# EAGLE board 13732-sparkfun-photon-redboard-panel_v10new (EAGLE 7.5.0), part 1 of 3
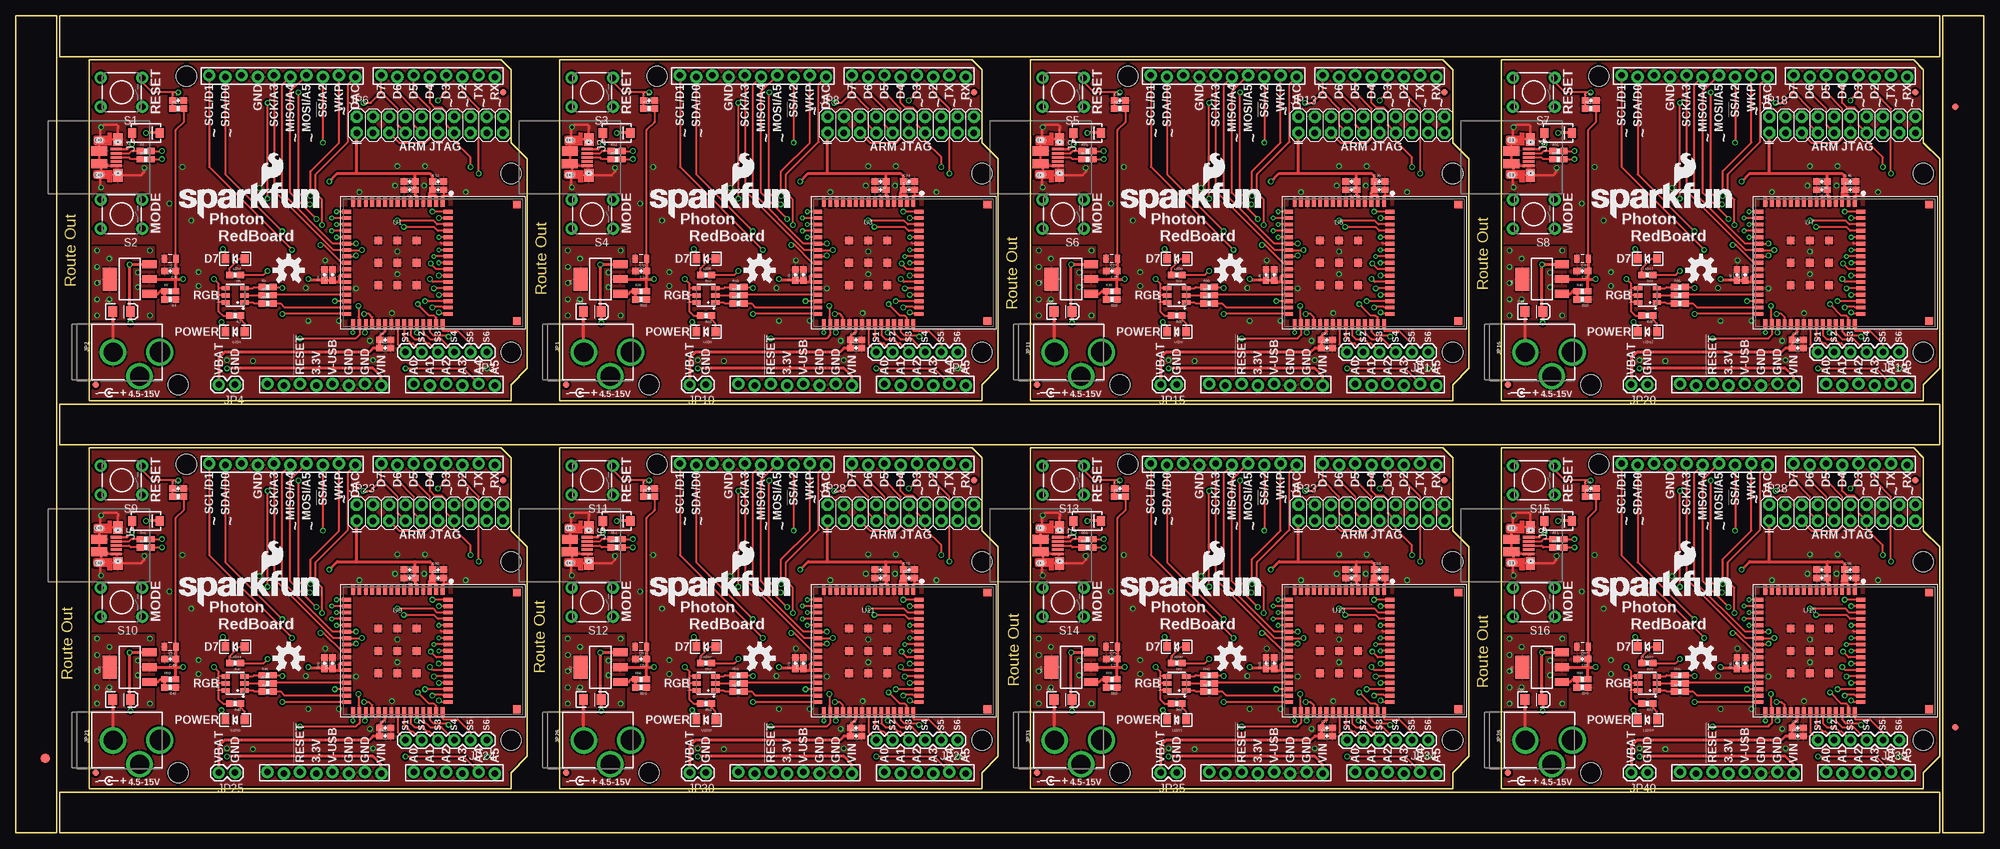
[diagram p0: board, top side]
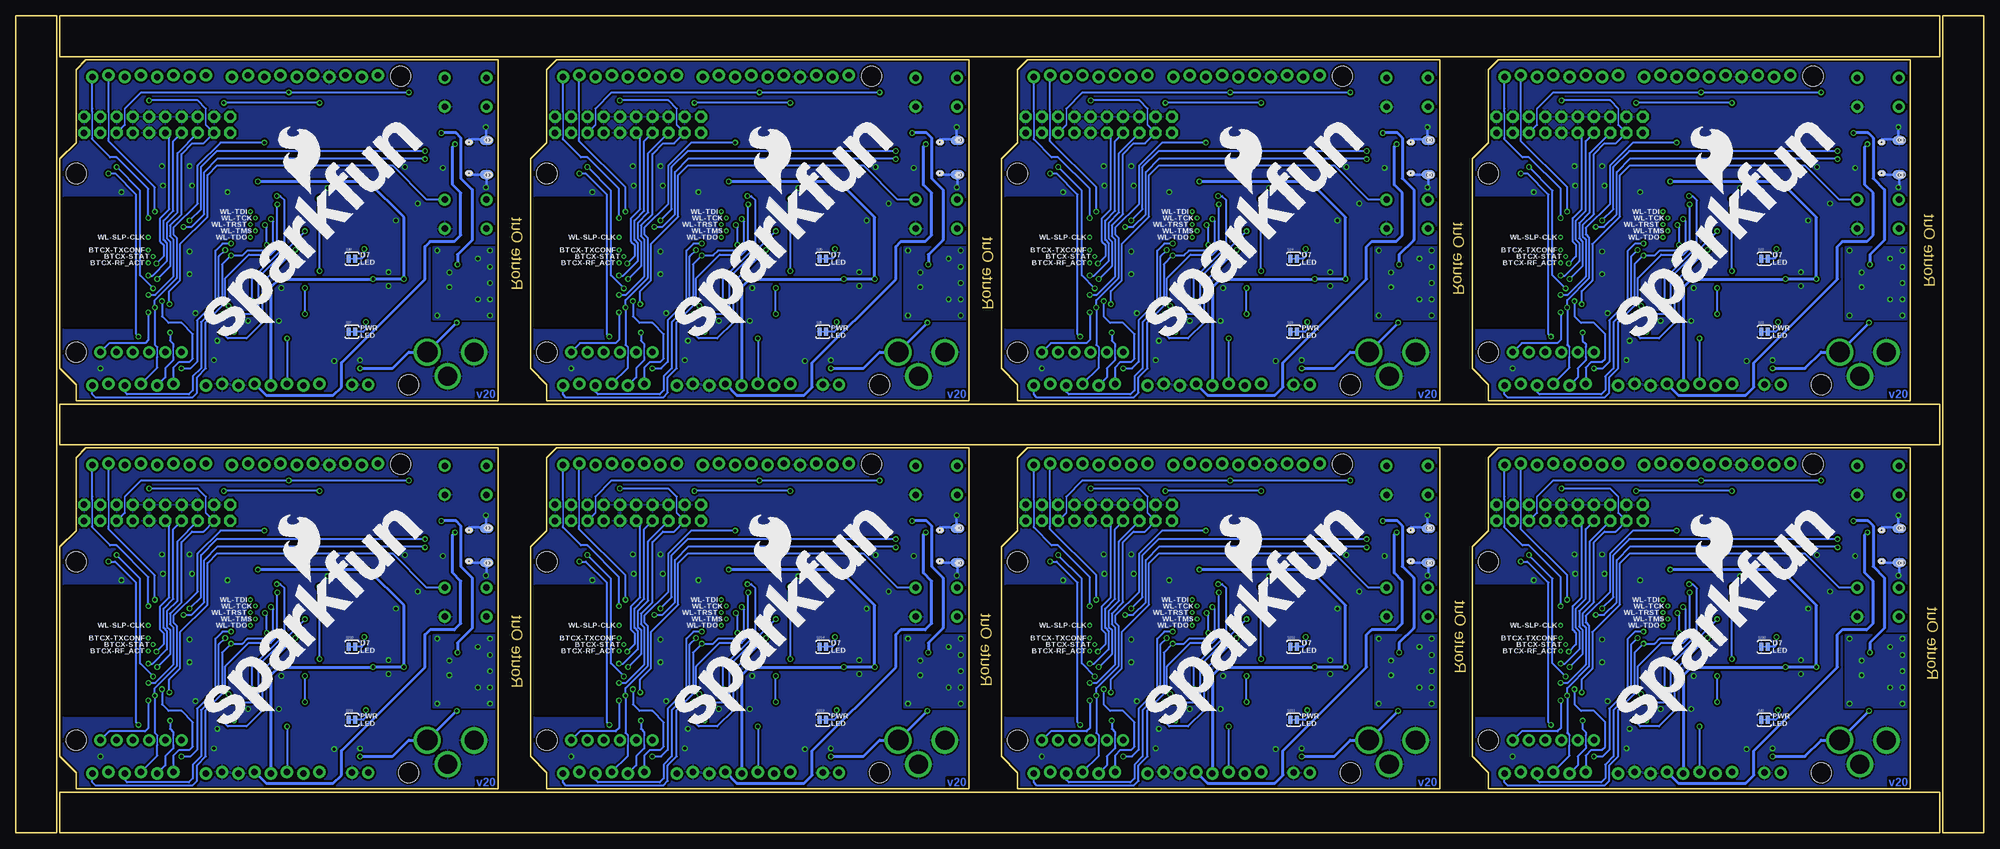
[diagram p1: board, bottom side, seen from below]

Size 307.85 x 127.76 mm. Coordinates in mm from the lower left corner, seen from the top.
Outline: 6.86,0 300.99,0 300.99,6.35 6.86,6.35 6.86,0
Outline: 6.86,67.06 6.86,60.71 300.99,60.71 300.99,67.06 6.86,67.06
Outline: 6.86,121.41 300.99,121.41 300.99,127.76 6.86,127.76 6.86,121.41
Outline: 6.35,0 6.35,127.76 0,127.76 0,0 6.35,0
Outline: 307.85,0 307.85,127.76 301.5,127.76 301.5,0 307.85,0
Outline: 11.43,67.56 11.43,120.9 75.95,120.9 77.47,119.38 77.47,107.95 80.01,105.41 80.01,72.64 77.47,70.1 77.47,67.56 11.43,67.56
Outline: 85.09,67.56 85.09,120.9 149.61,120.9 151.13,119.38 151.13,107.95 153.67,105.41 153.67,72.64 151.13,70.1 151.13,67.56 85.09,67.56
Outline: 158.75,67.56 158.75,120.9 223.27,120.9 224.79,119.38 224.79,107.95 227.33,105.41 227.33,72.64 224.79,70.1 224.79,67.56 158.75,67.56
Outline: 232.41,67.56 232.41,120.9 296.93,120.9 298.45,119.38 298.45,107.95 300.99,105.41 300.99,72.64 298.45,70.1 298.45,67.56 232.41,67.56
Outline: 11.43,6.86 11.43,60.2 75.95,60.2 77.47,58.67 77.47,47.24 80.01,44.7 80.01,11.94 77.47,9.4 77.47,6.86 11.43,6.86
Outline: 85.09,6.86 85.09,60.2 149.61,60.2 151.13,58.67 151.13,47.24 153.67,44.7 153.67,11.94 151.13,9.4 151.13,6.86 85.09,6.86
Outline: 158.75,6.86 158.75,60.2 223.27,60.2 224.79,58.67 224.79,47.24 227.33,44.7 227.33,11.94 224.79,9.4 224.79,6.86 158.75,6.86
Outline: 232.41,6.86 232.41,60.2 296.93,60.2 298.45,58.67 298.45,47.24 300.99,44.7 300.99,11.94 298.45,9.4 298.45,6.86 232.41,6.86
Copper layers (1*16): Top 0.035mm / dielectric 1.5mm / Bottom 0.035mm
Design rules "SparkFun-2-layer-TIGHT": minimum track width 7mil, minimum drill 15mil, track to track 7mil, track to pad 7mil, pad to pad 7mil, via to via 7mil, smd to smd 7mil, copper to edge 7mil, drill to drill 7mil, minimum pad ring 7mil, minimum via ring 7mil, stop-mask expansion 4mil, vias tented up to drill 25mil, thermal gap 10mil
Net classes: 0 default: width 0.203 mm

## Footprints (pad centres in the part's own frame; a part is rotated, then mirrored left to right if it is on the bottom)
EIA3216 = smd 1.4 x 1.6: A 1.4,0; C -1.4,0
0603-CAP = smd 1.1 x 1: 1 -0.85,0; 2 0.85,0
0805 = smd 0.8 x 1.2: 1 -0.9,0; 2 0.9,0
SMA-DIODE = smd 1.27 x 1.47: A -2.15,0; C 2.15,0
FIDUCIAL-1.5X3 = smd 1.5 x 1.5: 1 0,0
FIDUCIAL-1X2 = smd 1 x 1: 1 0,0
USB-MICROB-PTH = smd 0.4 x 1.75: D+ 0.031,1.331; D- -0.619,1.331; GND 1.331,1.331; ID 0.681,1.331; VBUS -1.269,1.331 | smd 1.4 x 2.1 bottom: P$1 2.701,-1.142; P$3 -2.659,-1.144 | smd 1 x 1.3: P$2 2.487,1.594; P$6 -2.368,1.604 | smd 1 x 1.3 bottom: P$4 -2.368,1.604; P$10 2.481,1.598 | smd 1.1 x 1.5: P$8 2.701,-1.142; P$12 -2.659,-1.144 | smd 2 x 1.46: SHEILD2 2.831,1.606; SHIELD -2.794,1.606 | smd 1.425 x 2.5: SHIELD3 -0.979,-1.349; SHIELD4 0.996,-1.352 | hole 0.7: -2.693,-1.134; -2.693,-1.3; -2.694,-1.499; -2.694,-1.664; 2.768,-1.134; 2.767,-1.303; 2.766,-1.496; 2.766,-1.664 | hole 0.66: -2.359,1.821; -2.349,1.691; -2.359,1.541; -2.354,1.432; 2.481,1.821; 2.491,1.691; 2.481,1.541; 2.486,1.432
POWER_JACK_PTH_LOCK = drill 2.997 pad 4.115: GND 0.025,6.557; GNDBREAK 3.762,10.7 | drill 3.2 pad 4.115: PWR 0,13.878
1X06 = drill 1.016 pad 1.88: 1 0,0; 2 2.54,0; 3 5.08,0; 4 7.62,0; 5 10.16,0; 6 12.7,0
1X02 = drill 1.016 pad 1.88: 1 0,0; 2 2.54,0
ARDUINO_R3_NOISP_LOCKING = drill 1.016 pad 1.93: 3.3V 35.56,2.413; 5V 38.1,2.667; A0 50.8,2.667; A1 53.34,2.413; A2 55.88,2.667; A3 58.42,2.413; A4 60.96,2.667; A5 63.5,2.413; AREF 23.876,50.927; D0 63.5,50.673; D1 60.96,50.927; D2 58.42,50.673; D3 55.88,50.927; D4 53.34,50.673; D5 50.8,50.927; D6 48.26,50.673; D7 45.72,50.927; D8 41.656,50.673; D9 39.116,50.927; D10 36.576,50.673; D11 34.036,50.927; D12 31.496,50.673; D13 28.956,50.927; GND@1 40.64,2.413; GND@2 43.18,2.667; GND@3 26.416,50.673; IOREF 30.48,2.413; NC 27.94,2.667; RESET@1 33.02,2.667; SCL 18.796,50.927; SDA 21.336,50.673; VIN 45.72,2.413 | hole 3.175: 15.24,50.8; 66.04,35.56; 66.04,7.62; 13.97,2.54
2X10 = drill 1.016 pad 1.88 octagon: 1 -11.43,-1.27; 2 -11.43,1.27; 3 -8.89,-1.27; 4 -8.89,1.27; 5 -6.35,-1.27; 6 -6.35,1.27; 7 -3.81,-1.27; 8 -3.81,1.27; 9 -1.27,-1.27; 10 -1.27,1.27; 11 1.27,-1.27; 12 1.27,1.27; 13 3.81,-1.27; 14 3.81,1.27; 15 6.35,-1.27; 16 6.35,1.27; 17 8.89,-1.27; 18 8.89,1.27; 19 11.43,-1.27; 20 11.43,1.27
LED-1206 = smd 1.2 x 1.4: A -1.5,0; C 1.5,0
PLCC-6-LED = smd 0.7 x 1.3: AB -1.1,1.475; AG 1.1,1.475; AR 0,1.475; CB -1.1,-1.475; CG 1.1,-1.475; CR 0,-1.475
0603-RES = smd 1.1 x 1: 1 -0.85,0; 2 0.85,0
TACTILE-PTH = drill 1.016 pad 1.88: 1 -3.251,2.261; 2 3.251,2.261; 3 -3.251,-2.261; 4 3.251,-2.261
PAD-JUMPER-2-NC_BY_TRACE_YES_SILK = smd 0.635 x 1.27: 1 -0.508,0; 2 0.508,0
TP_15TH = drill 0.381 pad 0.61: P$1 0,0
WM-N-BM-14 = smd 0.6 x 1.4: 1 7.05,9.5; 2 6.05,9.5; 3 5.05,9.5; 4 4.05,9.5; 5 3.05,9.5; 6 2.05,9.5; 7 1.05,9.5; 8 0.05,9.5; 9 -0.95,9.5; 10 -1.95,9.5; 11 -2.95,9.5; 12 -3.95,9.5; 13 -4.95,9.5; 14 -5.95,9.5; 15 -6.95,9.5; 33 -6.95,-9.5; 34 -5.95,-9.5; 35 -4.95,-9.5; 36 -3.95,-9.5; 37 -2.95,-9.5; 38 -1.95,-9.5; 39 -0.95,-9.5; 40 0.05,-9.5; 41 1.05,-9.5; 42 2.05,-9.5; 43 3.05,-9.5; 44 4.05,-9.5; 45 5.05,-9.5; 46 6.05,-9.5; 47 7.05,-9.5 | smd 1.4 x 0.6: 16 -7.95,8; 17 -7.95,7; 18 -7.95,6; 19 -7.95,5; 20 -7.95,4; 21 -7.95,3; 22 -7.95,2; 23 -7.95,1; 24 -7.95,0; 25 -7.95,-1; 26 -7.95,-2; 27 -7.95,-3; 28 -7.95,-4; 29 -7.95,-5; 30 -7.95,-6; 31 -7.95,-7; 32 -7.95,-8; 48 7.95,-8; 49 7.95,-7; 50 7.95,-6; 51 7.95,-5; 52 7.95,-4; 53 7.95,-3; 54 7.95,-2; 55 7.95,-1; 56 7.95,0; 57 7.95,1; 58 7.95,2; 59 7.95,3; 60 7.95,4; 61 7.95,5; 62 7.95,6; 63 7.95,7; 64 7.95,8 | smd 1.2 x 1.2: 65 3,3.5; 66 0,3.5; 67 -3,3.5; 68 3,0; 69 0,0; 70 -3,0; 71 3,-3.5; 72 0,-3.5; 73 -3,-3.5; 74 18.67,-9.12; 75 18.67,9.12
SOT223 = smd 1.219 x 2.235: 1 -2.311,-3.099; 2 0,-3.099; 3 2.311,-3.099 | smd 3.6 x 2.2: 4 0,3.099

## Placement (x,y rotation side)
C1  10uF  [EIA3216]  16.51,81.53 0 top
C2  0.1uF  [0603-CAP]  25.4,114.55 0 top
C3  22uF  [0805]  24.13,89.79 180 top
C4  0.1uF  [0603-CAP]  24.13,87.88 180 top
C5  10uF  [0603-CAP]  57.78,77.09 0 top
C6  0.1uF  [0603-CAP]  57.78,75.82 0 top
C7  10uF  [0603-CAP]  61.59,100.58 180 top
C8  0.1uF  [0603-CAP]  61.59,101.85 180 top
C9  0.1uF  [0603-CAP]  48.26,87.25 90 top
C10  10uF  [0603-CAP]  49.53,87.25 90 top
C11  10uF  [0603-CAP]  66.04,100.58 0 top
C12  0.1uF  [0603-CAP]  66.04,101.85 0 top
C13  0.1uF  [0603-CAP]  97.79,87.88 180 top
C14  10uF  [EIA3216]  90.17,81.53 0 top
C15  22uF  [0805]  97.79,89.79 180 top
C16  0.1uF  [0603-CAP]  99.06,114.55 0 top
C17  10uF  [0603-CAP]  131.44,77.09 0 top
C18  10uF  [0603-CAP]  135.25,100.58 180 top
C19  10uF  [0603-CAP]  123.19,87.25 90 top
C20  10uF  [0603-CAP]  139.7,100.58 0 top
C21  0.1uF  [0603-CAP]  131.44,75.82 0 top
C22  0.1uF  [0603-CAP]  135.25,101.85 180 top
C23  0.1uF  [0603-CAP]  121.92,87.25 90 top
C24  0.1uF  [0603-CAP]  139.7,101.85 0 top
C25  0.1uF  [0603-CAP]  171.45,87.88 180 top
C26  10uF  [EIA3216]  163.83,81.53 0 top
C27  22uF  [0805]  171.45,89.79 180 top
C28  0.1uF  [0603-CAP]  172.72,114.55 0 top
C29  10uF  [0603-CAP]  205.1,77.09 0 top
C30  10uF  [0603-CAP]  208.91,100.58 180 top
C31  10uF  [0603-CAP]  196.85,87.25 90 top
C32  10uF  [0603-CAP]  213.36,100.58 0 top
C33  0.1uF  [0603-CAP]  205.1,75.82 0 top
C34  0.1uF  [0603-CAP]  208.91,101.85 180 top
C35  0.1uF  [0603-CAP]  195.58,87.25 90 top
C36  0.1uF  [0603-CAP]  213.36,101.85 0 top
C37  0.1uF  [0603-CAP]  245.11,87.88 180 top
C38  10uF  [EIA3216]  237.49,81.53 0 top
C39  22uF  [0805]  245.11,89.79 180 top
C40  0.1uF  [0603-CAP]  246.38,114.55 0 top
C41  10uF  [0603-CAP]  278.76,77.09 0 top
C42  10uF  [0603-CAP]  282.57,100.58 180 top
C43  10uF  [0603-CAP]  270.51,87.25 90 top
C44  10uF  [0603-CAP]  287.02,100.58 0 top
C45  0.1uF  [0603-CAP]  278.76,75.82 0 top
C46  0.1uF  [0603-CAP]  282.57,101.85 180 top
C47  0.1uF  [0603-CAP]  269.24,87.25 90 top
C48  0.1uF  [0603-CAP]  287.02,101.85 0 top
C49  0.1uF  [0603-CAP]  24.13,27.18 180 top
C50  10uF  [EIA3216]  16.51,20.83 0 top
C51  22uF  [0805]  24.13,29.08 180 top
C52  0.1uF  [0603-CAP]  25.4,53.85 0 top
C53  10uF  [0603-CAP]  57.78,16.38 0 top
C54  10uF  [0603-CAP]  61.59,39.88 180 top
C55  10uF  [0603-CAP]  49.53,26.54 90 top
C56  10uF  [0603-CAP]  66.04,39.88 0 top
C57  0.1uF  [0603-CAP]  57.78,15.11 0 top
C58  0.1uF  [0603-CAP]  61.59,41.15 180 top
C59  0.1uF  [0603-CAP]  48.26,26.54 90 top
C60  0.1uF  [0603-CAP]  66.04,41.15 0 top
C61  0.1uF  [0603-CAP]  97.79,27.18 180 top
C62  10uF  [EIA3216]  90.17,20.83 0 top
C63  22uF  [0805]  97.79,29.08 180 top
C64  0.1uF  [0603-CAP]  99.06,53.85 0 top
C65  10uF  [0603-CAP]  131.44,16.38 0 top
C66  10uF  [0603-CAP]  135.25,39.88 180 top
C67  10uF  [0603-CAP]  123.19,26.54 90 top
C68  10uF  [0603-CAP]  139.7,39.88 0 top
C69  0.1uF  [0603-CAP]  131.44,15.11 0 top
C70  0.1uF  [0603-CAP]  135.25,41.15 180 top
C71  0.1uF  [0603-CAP]  121.92,26.54 90 top
C72  0.1uF  [0603-CAP]  139.7,41.15 0 top
C73  0.1uF  [0603-CAP]  171.45,27.18 180 top
C74  10uF  [EIA3216]  163.83,20.83 0 top
C75  22uF  [0805]  171.45,29.08 180 top
C76  0.1uF  [0603-CAP]  172.72,53.85 0 top
C77  10uF  [0603-CAP]  205.1,16.38 0 top
C78  10uF  [0603-CAP]  208.91,39.88 180 top
C79  10uF  [0603-CAP]  196.85,26.54 90 top
C80  10uF  [0603-CAP]  213.36,39.88 0 top
C81  0.1uF  [0603-CAP]  205.1,15.11 0 top
C82  0.1uF  [0603-CAP]  208.91,41.15 180 top
C83  0.1uF  [0603-CAP]  195.58,26.54 90 top
C84  0.1uF  [0603-CAP]  213.36,41.15 0 top
C85  0.1uF  [0603-CAP]  245.11,27.18 180 top
C86  10uF  [EIA3216]  237.49,20.83 0 top
C87  22uF  [0805]  245.11,29.08 180 top
C88  0.1uF  [0603-CAP]  246.38,53.85 0 top
C89  10uF  [0603-CAP]  278.76,16.38 0 top
C90  10uF  [0603-CAP]  282.57,39.88 180 top
C91  10uF  [0603-CAP]  270.51,26.54 90 top
C92  10uF  [0603-CAP]  287.02,39.88 0 top
C93  0.1uF  [0603-CAP]  278.76,15.11 0 top
C94  0.1uF  [0603-CAP]  282.57,41.15 180 top
C95  0.1uF  [0603-CAP]  269.24,26.54 90 top
C96  0.1uF  [0603-CAP]  287.02,41.15 0 top
D1  MBRA140  [SMA-DIODE]  20.32,109.47 0 top
D2  MBRA140  [SMA-DIODE]  93.98,109.47 0 top
D3  MBRA140  [SMA-DIODE]  167.64,109.47 0 top
D4  MBRA140  [SMA-DIODE]  241.3,109.47 0 top
D5  MBRA140  [SMA-DIODE]  20.32,48.77 0 top
D6  MBRA140  [SMA-DIODE]  93.98,48.77 0 top
D7  MBRA140  [SMA-DIODE]  167.64,48.77 0 top
D8  MBRA140  [SMA-DIODE]  241.3,48.77 0 top
E$1  [FIDUCIAL-1.5X3]  4.57,11.68 0 top
E$7  [FIDUCIAL-1X2]  303.4,16.51 0 top
E$8  [FIDUCIAL-1X2]  303.4,113.54 180 top
FID1  FIDUCIAL1X2  [FIDUCIAL-1X2]  76.2,115.82 0 top
FID2  FIDUCIAL1X2  [FIDUCIAL-1X2]  12.45,70.1 0 top
FID3  FIDUCIAL1X2  [FIDUCIAL-1X2]  86.11,70.1 0 top
FID4  FIDUCIAL1X2  [FIDUCIAL-1X2]  149.86,115.82 0 top
FID5  FIDUCIAL1X2  [FIDUCIAL-1X2]  159.77,70.1 0 top
FID6  FIDUCIAL1X2  [FIDUCIAL-1X2]  223.52,115.82 0 top
FID7  FIDUCIAL1X2  [FIDUCIAL-1X2]  233.43,70.1 0 top
FID8  FIDUCIAL1X2  [FIDUCIAL-1X2]  297.18,115.82 0 top
FID9  FIDUCIAL1X2  [FIDUCIAL-1X2]  12.45,9.4 0 top
FID10  FIDUCIAL1X2  [FIDUCIAL-1X2]  76.2,55.12 0 top
FID11  FIDUCIAL1X2  [FIDUCIAL-1X2]  86.11,9.4 0 top
FID12  FIDUCIAL1X2  [FIDUCIAL-1X2]  149.86,55.12 0 top
FID13  FIDUCIAL1X2  [FIDUCIAL-1X2]  159.77,9.4 0 top
FID14  FIDUCIAL1X2  [FIDUCIAL-1X2]  223.52,55.12 0 top
FID15  FIDUCIAL1X2  [FIDUCIAL-1X2]  233.43,9.4 0 top
FID16  FIDUCIAL1X2  [FIDUCIAL-1X2]  297.18,55.12 0 top
J1  AMP FCI 10103594-0001LF  [USB-MICROB-PTH]  14.35,105.66 270 top
J2  AMP FCI 10103594-0001LF  [USB-MICROB-PTH]  88.01,105.66 270 top
J3  AMP FCI 10103594-0001LF  [USB-MICROB-PTH]  161.67,105.66 270 top
J4  AMP FCI 10103594-0001LF  [USB-MICROB-PTH]  235.33,105.66 270 top
J5  AMP FCI 10103594-0001LF  [USB-MICROB-PTH]  14.35,44.96 270 top
J6  AMP FCI 10103594-0001LF  [USB-MICROB-PTH]  88.01,44.96 270 top
J7  AMP FCI 10103594-0001LF  [USB-MICROB-PTH]  161.67,44.96 270 top
J8  AMP FCI 10103594-0001LF  [USB-MICROB-PTH]  235.33,44.96 270 top
JP1  POWER  [POWER_JACK_PTH_LOCK]  82.3,75.18 270 top
JP2  POWER  [POWER_JACK_PTH_LOCK]  8.64,75.18 270 top
JP3  DNP  [1X06]  73.66,75.18 180 top
JP4  DNP  [1X02]  34.29,70.1 180 top
JP5  ARDUINO_R3_NOISPLOCKING  [ARDUINO_R3_NOISP_LOCKING]  11.43,67.56 0 top
JP6  DNP  [2X10]  64.77,110.74 0 top
JP7  ARDUINO_R3_NOISPLOCKING  [ARDUINO_R3_NOISP_LOCKING]  85.09,67.56 0 top
JP8  DNP  [2X10]  138.43,110.74 0 top
JP9  DNP  [1X06]  147.32,75.18 180 top
JP10  DNP  [1X02]  107.95,70.1 180 top
JP11  POWER  [POWER_JACK_PTH_LOCK]  155.96,75.18 270 top
JP12  ARDUINO_R3_NOISPLOCKING  [ARDUINO_R3_NOISP_LOCKING]  158.75,67.56 0 top
JP13  DNP  [2X10]  212.09,110.74 0 top
JP14  DNP  [1X06]  220.98,75.18 180 top
JP15  DNP  [1X02]  181.61,70.1 180 top
JP16  POWER  [POWER_JACK_PTH_LOCK]  229.62,75.18 270 top
JP17  ARDUINO_R3_NOISPLOCKING  [ARDUINO_R3_NOISP_LOCKING]  232.41,67.56 0 top
JP18  DNP  [2X10]  285.75,110.74 0 top
JP19  DNP  [1X06]  294.64,75.18 180 top
JP20  DNP  [1X02]  255.27,70.1 180 top
JP21  POWER  [POWER_JACK_PTH_LOCK]  8.64,14.48 270 top
JP22  ARDUINO_R3_NOISPLOCKING  [ARDUINO_R3_NOISP_LOCKING]  11.43,6.86 0 top
JP23  DNP  [2X10]  64.77,50.04 0 top
JP24  DNP  [1X06]  73.66,14.48 180 top
JP25  DNP  [1X02]  34.29,9.4 180 top
JP26  POWER  [POWER_JACK_PTH_LOCK]  82.3,14.48 270 top
JP27  ARDUINO_R3_NOISPLOCKING  [ARDUINO_R3_NOISP_LOCKING]  85.09,6.86 0 top
JP28  DNP  [2X10]  138.43,50.04 0 top
JP29  DNP  [1X06]  147.32,14.48 180 top
JP30  DNP  [1X02]  107.95,9.4 180 top
JP31  POWER  [POWER_JACK_PTH_LOCK]  155.96,14.48 270 top
JP32  ARDUINO_R3_NOISPLOCKING  [ARDUINO_R3_NOISP_LOCKING]  158.75,6.86 0 top
JP33  DNP  [2X10]  212.09,50.04 0 top
JP34  DNP  [1X06]  220.98,14.48 180 top
JP35  DNP  [1X02]  181.61,9.4 180 top
JP36  POWER  [POWER_JACK_PTH_LOCK]  229.62,14.48 270 top
JP37  ARDUINO_R3_NOISPLOCKING  [ARDUINO_R3_NOISP_LOCKING]  232.41,6.86 0 top
JP38  DNP  [2X10]  285.75,50.04 0 top
JP39  DNP  [1X06]  294.64,14.48 180 top
JP40  DNP  [1X02]  255.27,9.4 180 top
LED1  RED  [LED-1206]  34.29,78.36 180 top
LED2  BLUE  [LED-1206]  34.29,89.79 180 top
LED3  RGB LED  [PLCC-6-LED]  34.29,84.07 90 top
LED4  RGB LED  [PLCC-6-LED]  107.95,84.07 90 top
LED5  BLUE  [LED-1206]  107.95,89.79 180 top
LED6  RED  [LED-1206]  107.95,78.36 180 top
LED7  RGB LED  [PLCC-6-LED]  181.61,84.07 90 top
LED8  BLUE  [LED-1206]  181.61,89.79 180 top
LED9  RED  [LED-1206]  181.61,78.36 180 top
LED10  RGB LED  [PLCC-6-LED]  255.27,84.07 90 top
LED11  BLUE  [LED-1206]  255.27,89.79 180 top
LED12  RED  [LED-1206]  255.27,78.36 180 top
LED13  RGB LED  [PLCC-6-LED]  34.29,23.37 90 top
LED14  BLUE  [LED-1206]  34.29,29.08 180 top
LED15  RED  [LED-1206]  34.29,17.65 180 top
LED16  RGB LED  [PLCC-6-LED]  107.95,23.37 90 top
LED17  BLUE  [LED-1206]  107.95,29.08 180 top
LED18  RED  [LED-1206]  107.95,17.65 180 top
LED19  RGB LED  [PLCC-6-LED]  181.61,23.37 90 top
LED20  BLUE  [LED-1206]  181.61,29.08 180 top
LED21  RED  [LED-1206]  181.61,17.65 180 top
LED22  RGB LED  [PLCC-6-LED]  255.27,23.37 90 top
LED23  BLUE  [LED-1206]  255.27,29.08 180 top
LED24  RED  [LED-1206]  255.27,17.65 180 top
LOGO1  OSHW-LOGOM  [OSHW-LOGO-M]  42.67,88.01 0 top
LOGO2  SFE_LOGO_NAME_FLAME.2_INCH  [SFE_LOGO_NAME_FLAME_.2]  24.89,96.01 0 top
LOGO3  SFE_LOGO_NAME_FLAME.4_INCH  [SFE_LOGO_NAME_FLAME_.4]  52.07,73.91 45 bottom
LOGO4  SFE_LOGO_NAME_FLAME.2_INCH  [SFE_LOGO_NAME_FLAME_.2]  98.55,96.01 0 top
LOGO5  OSHW-LOGOM  [OSHW-LOGO-M]  116.33,88.01 0 top
LOGO6  SFE_LOGO_NAME_FLAME.4_INCH  [SFE_LOGO_NAME_FLAME_.4]  125.73,73.91 45 bottom
LOGO7  SFE_LOGO_NAME_FLAME.2_INCH  [SFE_LOGO_NAME_FLAME_.2]  172.21,96.01 0 top
LOGO8  OSHW-LOGOM  [OSHW-LOGO-M]  189.99,88.01 0 top
LOGO9  SFE_LOGO_NAME_FLAME.4_INCH  [SFE_LOGO_NAME_FLAME_.4]  199.39,73.91 45 bottom
LOGO10  SFE_LOGO_NAME_FLAME.2_INCH  [SFE_LOGO_NAME_FLAME_.2]  245.87,96.01 0 top
LOGO11  OSHW-LOGOM  [OSHW-LOGO-M]  263.65,88.01 0 top
LOGO12  SFE_LOGO_NAME_FLAME.4_INCH  [SFE_LOGO_NAME_FLAME_.4]  273.05,73.91 45 bottom
LOGO13  SFE_LOGO_NAME_FLAME.2_INCH  [SFE_LOGO_NAME_FLAME_.2]  24.89,35.31 0 top
LOGO14  OSHW-LOGOM  [OSHW-LOGO-M]  42.67,27.3 0 top
LOGO15  SFE_LOGO_NAME_FLAME.4_INCH  [SFE_LOGO_NAME_FLAME_.4]  52.07,13.21 45 bottom
LOGO16  SFE_LOGO_NAME_FLAME.2_INCH  [SFE_LOGO_NAME_FLAME_.2]  98.55,35.31 0 top
LOGO17  OSHW-LOGOM  [OSHW-LOGO-M]  116.33,27.3 0 top
LOGO18  SFE_LOGO_NAME_FLAME.4_INCH  [SFE_LOGO_NAME_FLAME_.4]  125.73,13.21 45 bottom
LOGO19  SFE_LOGO_NAME_FLAME.2_INCH  [SFE_LOGO_NAME_FLAME_.2]  172.21,35.31 0 top
LOGO20  OSHW-LOGOM  [OSHW-LOGO-M]  189.99,27.3 0 top
LOGO21  SFE_LOGO_NAME_FLAME.4_INCH  [SFE_LOGO_NAME_FLAME_.4]  199.39,13.21 45 bottom
LOGO22  SFE_LOGO_NAME_FLAME.2_INCH  [SFE_LOGO_NAME_FLAME_.2]  245.87,35.31 0 top
LOGO23  OSHW-LOGOM  [OSHW-LOGO-M]  263.65,27.3 0 top
LOGO24  SFE_LOGO_NAME_FLAME.4_INCH  [SFE_LOGO_NAME_FLAME_.4]  273.05,13.21 45 bottom
R1  22  [0603-RES]  20.32,106.62 0 top
R2  22  [0603-RES]  20.32,105.35 0 top
R3  1K  [0603-RES]  34.29,80.9 180 top
R4  390  [0603-RES]  24.13,83.44 180 top
R5  300  [0603-RES]  34.29,87.25 180 top
R6  10K  [0603-RES]  25.4,113.28 0 top
R7  240  [0603-RES]  24.13,84.71 0 top
R8  100  [0603-RES]  39.37,85.34 0 top
R9  100  [0603-RES]  39.37,84.07 0 top
R10  300  [0603-RES]  39.37,82.8 0 top
R11  22  [0603-RES]  93.98,106.62 0 top
R12  22  [0603-RES]  93.98,105.35 0 top
R13  10K  [0603-RES]  99.06,113.28 0 top
R14  300  [0603-RES]  113.03,82.8 0 top
R15  100  [0603-RES]  113.03,84.07 0 top
R16  100  [0603-RES]  113.03,85.34 0 top
R17  300  [0603-RES]  107.95,87.25 180 top
R18  1K  [0603-RES]  107.95,80.9 180 top
R19  390  [0603-RES]  97.79,83.44 180 top
R20  240  [0603-RES]  97.79,84.71 0 top
R21  22  [0603-RES]  167.64,106.62 0 top
R22  22  [0603-RES]  167.64,105.35 0 top
R23  10K  [0603-RES]  172.72,113.28 0 top
R24  300  [0603-RES]  186.69,82.8 0 top
R25  100  [0603-RES]  186.69,84.07 0 top
R26  100  [0603-RES]  186.69,85.34 0 top
R27  300  [0603-RES]  181.61,87.25 180 top
R28  1K  [0603-RES]  181.61,80.9 180 top
R29  390  [0603-RES]  171.45,83.44 180 top
R30  240  [0603-RES]  171.45,84.71 0 top
R31  22  [0603-RES]  241.3,106.62 0 top
R32  22  [0603-RES]  241.3,105.35 0 top
R33  10K  [0603-RES]  246.38,113.28 0 top
R34  300  [0603-RES]  260.35,82.8 0 top
R35  100  [0603-RES]  260.35,84.07 0 top
R36  100  [0603-RES]  260.35,85.34 0 top
R37  300  [0603-RES]  255.27,87.25 180 top
R38  1K  [0603-RES]  255.27,80.9 180 top
R39  390  [0603-RES]  245.11,83.44 180 top
R40  240  [0603-RES]  245.11,84.71 0 top
R41  22  [0603-RES]  20.32,45.92 0 top
R42  22  [0603-RES]  20.32,44.65 0 top
R43  10K  [0603-RES]  25.4,52.58 0 top
R44  300  [0603-RES]  39.37,22.1 0 top
R45  100  [0603-RES]  39.37,23.37 0 top
R46  100  [0603-RES]  39.37,24.64 0 top
R47  300  [0603-RES]  34.29,26.54 180 top
R48  1K  [0603-RES]  34.29,20.19 180 top
R49  390  [0603-RES]  24.13,22.73 180 top
R50  240  [0603-RES]  24.13,24 0 top
R51  22  [0603-RES]  93.98,45.92 0 top
R52  22  [0603-RES]  93.98,44.65 0 top
R53  10K  [0603-RES]  99.06,52.58 0 top
R54  300  [0603-RES]  113.03,22.1 0 top
R55  100  [0603-RES]  113.03,23.37 0 top
R56  100  [0603-RES]  113.03,24.64 0 top
R57  300  [0603-RES]  107.95,26.54 180 top
R58  1K  [0603-RES]  107.95,20.19 180 top
R59  390  [0603-RES]  97.79,22.73 180 top
R60  240  [0603-RES]  97.79,24 0 top
R61  22  [0603-RES]  167.64,45.92 0 top
R62  22  [0603-RES]  167.64,44.65 0 top
R63  10K  [0603-RES]  172.72,52.58 0 top
R64  300  [0603-RES]  186.69,22.1 0 top
R65  100  [0603-RES]  186.69,23.37 0 top
R66  100  [0603-RES]  186.69,24.64 0 top
R67  300  [0603-RES]  181.61,26.54 180 top
R68  1K  [0603-RES]  181.61,20.19 180 top
R69  390  [0603-RES]  171.45,22.73 180 top
R70  240  [0603-RES]  171.45,24 0 top
R71  22  [0603-RES]  241.3,45.92 0 top
R72  22  [0603-RES]  241.3,44.65 0 top
R73  10K  [0603-RES]  246.38,52.58 0 top
R74  300  [0603-RES]  260.35,22.1 0 top
R75  100  [0603-RES]  260.35,23.37 0 top
R76  100  [0603-RES]  260.35,24.64 0 top
R77  300  [0603-RES]  255.27,26.54 180 top
R78  1K  [0603-RES]  255.27,20.19 180 top
R79  390  [0603-RES]  245.11,22.73 180 top
R80  240  [0603-RES]  245.11,24 0 top
S1  RESET  [TACTILE-PTH]  16.51,115.82 180 top
S2  MODE  [TACTILE-PTH]  16.51,96.77 180 top
S3  RESET  [TACTILE-PTH]  90.17,115.82 180 top
S4  MODE  [TACTILE-PTH]  90.17,96.77 180 top
S5  RESET  [TACTILE-PTH]  163.83,115.82 180 top
S6  MODE  [TACTILE-PTH]  163.83,96.77 180 top
S7  RESET  [TACTILE-PTH]  237.49,115.82 180 top
S8  MODE  [TACTILE-PTH]  237.49,96.77 180 top
S9  RESET  [TACTILE-PTH]  16.51,55.12 180 top
S10  MODE  [TACTILE-PTH]  16.51,36.07 180 top
S11  RESET  [TACTILE-PTH]  90.17,55.12 180 top
S12  MODE  [TACTILE-PTH]  90.17,36.07 180 top
S13  RESET  [TACTILE-PTH]  163.83,55.12 180 top
S14  MODE  [TACTILE-PTH]  163.83,36.07 180 top
S15  RESET  [TACTILE-PTH]  237.49,55.12 180 top
S16  MODE  [TACTILE-PTH]  237.49,36.07 180 top
SJ1  PWR-LED  [PAD-JUMPER-2-NC_BY_TRACE_YES_SILK]  34.29,78.36 0 bottom
SJ2  D7-LED  [PAD-JUMPER-2-NC_BY_TRACE_YES_SILK]  34.29,89.79 0 bottom
SJ3  PWR-LED  [PAD-JUMPER-2-NC_BY_TRACE_YES_SILK]  107.95,78.36 0 bottom
SJ4  D7-LED  [PAD-JUMPER-2-NC_BY_TRACE_YES_SILK]  107.95,89.79 0 bottom
SJ5  PWR-LED  [PAD-JUMPER-2-NC_BY_TRACE_YES_SILK]  181.61,78.36 0 bottom
SJ6  D7-LED  [PAD-JUMPER-2-NC_BY_TRACE_YES_SILK]  181.61,89.79 0 bottom
SJ7  PWR-LED  [PAD-JUMPER-2-NC_BY_TRACE_YES_SILK]  255.27,78.36 0 bottom
SJ8  D7-LED  [PAD-JUMPER-2-NC_BY_TRACE_YES_SILK]  255.27,89.79 0 bottom
SJ9  PWR-LED  [PAD-JUMPER-2-NC_BY_TRACE_YES_SILK]  34.29,17.65 0 bottom
SJ10  D7-LED  [PAD-JUMPER-2-NC_BY_TRACE_YES_SILK]  34.29,29.08 0 bottom
SJ11  PWR-LED  [PAD-JUMPER-2-NC_BY_TRACE_YES_SILK]  107.95,17.65 0 bottom
SJ12  D7-LED  [PAD-JUMPER-2-NC_BY_TRACE_YES_SILK]  107.95,29.08 0 bottom
SJ13  PWR-LED  [PAD-JUMPER-2-NC_BY_TRACE_YES_SILK]  181.61,17.65 0 bottom
SJ14  D7-LED  [PAD-JUMPER-2-NC_BY_TRACE_YES_SILK]  181.61,29.08 0 bottom
SJ15  PWR-LED  [PAD-JUMPER-2-NC_BY_TRACE_YES_SILK]  255.27,17.65 0 bottom
SJ16  D7-LED  [PAD-JUMPER-2-NC_BY_TRACE_YES_SILK]  255.27,29.08 0 bottom
TP1  TEST-POINTTP_15TH_THRU  [TP_15TH]  66.17,91.15 180 top
TP2  TEST-POINTTP_15TH_THRU  [TP_15TH]  66.17,89.15 180 top
TP3  TEST-POINTTP_15TH_THRU  [TP_15TH]  65.41,90.15 180 top
TP4  TEST-POINTTP_15TH_THRU  [TP_15TH]  50.16,97.15 0 top
TP5  TEST-POINTTP_15TH_THRU  [TP_15TH]  49.4,96.15 270 top
TP6  TEST-POINTTP_15TH_THRU  [TP_15TH]  50.16,95.15 0 top
TP7  TEST-POINTTP_15TH_THRU  [TP_15TH]  49.4,94.15 0 top
TP8  TEST-POINTTP_15TH_THRU  [TP_15TH]  50.16,93.15 0 top
TP9  TEST-POINTTP_15TH_THRU  [TP_15TH]  66.17,93.15 0 bottom
TP10  TEST-POINTTP_15TH_THRU  [TP_15TH]  52.74,78.23 0 top
TP11  TEST-POINTTP_15TH_THRU  [TP_15TH]  139.06,90.15 180 top
TP12  TEST-POINTTP_15TH_THRU  [TP_15TH]  139.83,91.15 180 top
TP13  TEST-POINTTP_15TH_THRU  [TP_15TH]  139.83,89.15 180 top
TP14  TEST-POINTTP_15TH_THRU  [TP_15TH]  123.83,97.15 0 top
TP15  TEST-POINTTP_15TH_THRU  [TP_15TH]  123.06,96.15 270 top
TP16  TEST-POINTTP_15TH_THRU  [TP_15TH]  123.83,95.15 0 top
TP17  TEST-POINTTP_15TH_THRU  [TP_15TH]  123.06,94.15 0 top
TP18  TEST-POINTTP_15TH_THRU  [TP_15TH]  123.83,93.15 0 top
TP19  TEST-POINTTP_15TH_THRU  [TP_15TH]  139.83,93.15 0 bottom
TP20  TEST-POINTTP_15TH_THRU  [TP_15TH]  126.4,78.23 0 top
TP21  TEST-POINTTP_15TH_THRU  [TP_15TH]  212.72,90.15 180 top
TP22  TEST-POINTTP_15TH_THRU  [TP_15TH]  213.49,91.15 180 top
TP23  TEST-POINTTP_15TH_THRU  [TP_15TH]  213.49,89.15 180 top
TP24  TEST-POINTTP_15TH_THRU  [TP_15TH]  197.49,97.15 0 top
TP25  TEST-POINTTP_15TH_THRU  [TP_15TH]  196.72,96.15 270 top
TP26  TEST-POINTTP_15TH_THRU  [TP_15TH]  197.49,95.15 0 top
TP27  TEST-POINTTP_15TH_THRU  [TP_15TH]  196.72,94.15 0 top
TP28  TEST-POINTTP_15TH_THRU  [TP_15TH]  197.49,93.15 0 top
TP29  TEST-POINTTP_15TH_THRU  [TP_15TH]  213.49,93.15 0 bottom
TP30  TEST-POINTTP_15TH_THRU  [TP_15TH]  200.06,78.23 0 top
TP31  TEST-POINTTP_15TH_THRU  [TP_15TH]  286.38,90.15 180 top
TP32  TEST-POINTTP_15TH_THRU  [TP_15TH]  287.15,91.15 180 top
TP33  TEST-POINTTP_15TH_THRU  [TP_15TH]  287.15,89.15 180 top
TP34  TEST-POINTTP_15TH_THRU  [TP_15TH]  271.14,97.15 0 top
TP35  TEST-POINTTP_15TH_THRU  [TP_15TH]  270.38,96.15 270 top
TP36  TEST-POINTTP_15TH_THRU  [TP_15TH]  271.14,95.15 0 top
TP37  TEST-POINTTP_15TH_THRU  [TP_15TH]  270.38,94.15 0 top
TP38  TEST-POINTTP_15TH_THRU  [TP_15TH]  271.14,93.15 0 top
TP39  TEST-POINTTP_15TH_THRU  [TP_15TH]  287.15,93.15 0 bottom
TP40  TEST-POINTTP_15TH_THRU  [TP_15TH]  273.72,78.23 0 top
TP41  TEST-POINTTP_15TH_THRU  [TP_15TH]  65.41,29.45 180 top
TP42  TEST-POINTTP_15TH_THRU  [TP_15TH]  66.17,30.45 180 top
TP43  TEST-POINTTP_15TH_THRU  [TP_15TH]  66.17,28.45 180 top
TP44  TEST-POINTTP_15TH_THRU  [TP_15TH]  50.16,36.45 0 top
TP45  TEST-POINTTP_15TH_THRU  [TP_15TH]  49.4,35.45 270 top
TP46  TEST-POINTTP_15TH_THRU  [TP_15TH]  50.16,34.45 0 top
TP47  TEST-POINTTP_15TH_THRU  [TP_15TH]  49.4,33.45 0 top
TP48  TEST-POINTTP_15TH_THRU  [TP_15TH]  50.16,32.45 0 top
TP49  TEST-POINTTP_15TH_THRU  [TP_15TH]  66.17,32.45 0 bottom
TP50  TEST-POINTTP_15TH_THRU  [TP_15TH]  52.74,17.53 0 top
TP51  TEST-POINTTP_15TH_THRU  [TP_15TH]  139.06,29.45 180 top
TP52  TEST-POINTTP_15TH_THRU  [TP_15TH]  139.83,30.45 180 top
TP53  TEST-POINTTP_15TH_THRU  [TP_15TH]  139.83,28.45 180 top
TP54  TEST-POINTTP_15TH_THRU  [TP_15TH]  123.83,36.45 0 top
TP55  TEST-POINTTP_15TH_THRU  [TP_15TH]  123.06,35.45 270 top
TP56  TEST-POINTTP_15TH_THRU  [TP_15TH]  123.83,34.45 0 top
TP57  TEST-POINTTP_15TH_THRU  [TP_15TH]  123.06,33.45 0 top
TP58  TEST-POINTTP_15TH_THRU  [TP_15TH]  123.83,32.45 0 top
TP59  TEST-POINTTP_15TH_THRU  [TP_15TH]  139.83,32.45 0 bottom
TP60  TEST-POINTTP_15TH_THRU  [TP_15TH]  126.4,17.53 0 top
TP61  TEST-POINTTP_15TH_THRU  [TP_15TH]  212.72,29.45 180 top
TP62  TEST-POINTTP_15TH_THRU  [TP_15TH]  213.49,30.45 180 top
TP63  TEST-POINTTP_15TH_THRU  [TP_15TH]  213.49,28.45 180 top
TP64  TEST-POINTTP_15TH_THRU  [TP_15TH]  197.49,36.45 0 top
TP65  TEST-POINTTP_15TH_THRU  [TP_15TH]  196.72,35.45 270 top
TP66  TEST-POINTTP_15TH_THRU  [TP_15TH]  197.49,34.45 0 top
TP67  TEST-POINTTP_15TH_THRU  [TP_15TH]  196.72,33.45 0 top
TP68  TEST-POINTTP_15TH_THRU  [TP_15TH]  197.49,32.45 0 top
TP69  TEST-POINTTP_15TH_THRU  [TP_15TH]  213.49,32.45 0 bottom
TP70  TEST-POINTTP_15TH_THRU  [TP_15TH]  200.06,17.53 0 top
TP71  TEST-POINTTP_15TH_THRU  [TP_15TH]  286.38,29.45 180 top
TP72  TEST-POINTTP_15TH_THRU  [TP_15TH]  287.15,30.45 180 top
TP73  TEST-POINTTP_15TH_THRU  [TP_15TH]  287.15,28.45 180 top
TP74  TEST-POINTTP_15TH_THRU  [TP_15TH]  271.14,36.45 0 top
TP75  TEST-POINTTP_15TH_THRU  [TP_15TH]  270.38,35.45 270 top
TP76  TEST-POINTTP_15TH_THRU  [TP_15TH]  271.14,34.45 0 top
TP77  TEST-POINTTP_15TH_THRU  [TP_15TH]  270.38,33.45 0 top
TP78  TEST-POINTTP_15TH_THRU  [TP_15TH]  271.14,32.45 0 top
TP79  TEST-POINTTP_15TH_THRU  [TP_15TH]  287.15,32.45 0 bottom
TP80  TEST-POINTTP_15TH_THRU  [TP_15TH]  273.72,17.53 0 top
U1  WM-N-BM-14  [WM-N-BM-14]  59.69,89.15 0 top
U2  [SOT223]  17.78,86.61 90 top
U3  WM-N-BM-14  [WM-N-BM-14]  133.35,89.15 0 top
U4  [SOT223]  91.44,86.61 90 top
U5  WM-N-BM-14  [WM-N-BM-14]  207.01,89.15 0 top
U6  [SOT223]  165.1,86.61 90 top
U7  WM-N-BM-14  [WM-N-BM-14]  280.67,89.15 0 top
U8  [SOT223]  238.76,86.61 90 top
U9  WM-N-BM-14  [WM-N-BM-14]  59.69,28.45 0 top
U10  [SOT223]  17.78,25.91 90 top
U11  WM-N-BM-14  [WM-N-BM-14]  133.35,28.45 0 top
U12  [SOT223]  91.44,25.91 90 top
U13  WM-N-BM-14  [WM-N-BM-14]  207.01,28.45 0 top
U14  [SOT223]  165.1,25.91 90 top
U15  WM-N-BM-14  [WM-N-BM-14]  280.67,28.45 0 top
U16  [SOT223]  238.76,25.91 90 top

## Library data of the parts
C1 C14 C26 C38 C50 C62 C74 C86 = SparkFun-Capacitors; PROD_ID: CAP-00811
C2 C4 C6 C8 C9 C12 C13 C16 C21-C25 C28 C33-C37 C40 C45-C49 C52 C57-C61 C64 C69-C73 C76 C81-C85 C88 C93-C96 = SparkFun-Capacitors; PROD_ID: CAP-00810
C3 C15 C27 C39 C51 C63 C75 C87 = SparkFun-Capacitors; PROD_ID: CAP-08402
C5 C7 C10 C11 C17-C20 C29-C32 C41-C44 C53-C56 C65-C68 C77-C80 C89-C92 = SparkFun-Capacitors; PROD_ID: CAP-11015
D1-D8 = SparkFun-DiscreteSemi; PROD_ID: DIO-08053
E$1 = SparkFun-Retired
E$7 E$8 FID1-FID16 LOGO1-LOGO24 = SparkFun-Aesthetics
J1-J8 = SparkFun-Connectors; PROD_ID: CONN-13711
JP1 JP2 JP11 JP16 JP21 JP26 JP31 JP36 = SparkFun-Connectors; PROD_ID: CONN-08197; SF_ID: PRT-00119
JP3 JP9 JP14 JP19 JP24 JP29 JP34 JP39 = SparkFun-Connectors; PROD_ID: CONN-08437
JP4 JP6 JP8 JP10 JP13 JP15 JP18 JP20 JP23 JP25 JP28 JP30 JP33 JP35 JP38 JP40 = SparkFun-Connectors
JP5 JP7 JP12 JP17 JP22 JP27 JP32 JP37 = sparkfun_photon_temp
LED1 LED6 LED9 LED12 LED15 LED18 LED21 LED24 = SparkFun-LED; PROD_ID: DIO-00809
LED2 LED5 LED8 LED11 LED14 LED17 LED20 LED23 = SparkFun-LED; PROD_ID: DIO-09911
LED3 LED4 LED7 LED10 LED13 LED16 LED19 LED22 = SparkFun-LED; PROD_ID: DIO-12113
R1 R2 R11 R12 R21 R22 R31 R32 R41 R42 R51 R52 R61 R62 R71 R72 = SparkFun-Resistors; PROD_ID: RES-08698
R3 R18 R28 R38 R48 R58 R68 R78 = SparkFun-Resistors; PROD_ID: RES-07856
R4 R19 R29 R39 R49 R59 R69 R79 = SparkFun-Resistors; PROD_ID: RES-07864
R5 R10 R14 R17 R24 R27 R34 R37 R44 R47 R54 R57 R64 R67 R74 R77 = SparkFun-Resistors; PROD_ID: RES_10328
R6 R13 R23 R33 R43 R53 R63 R73 = SparkFun-Resistors; PROD_ID: RES-00824
R7 R20 R30 R40 R50 R60 R70 R80 = SparkFun-Resistors; PROD_ID: RES-07849
R8 R9 R15 R16 R25 R26 R35 R36 R45 R46 R55 R56 R65 R66 R75 R76 = SparkFun-Resistors; PROD_ID: RES-07863
S1-S16 = SparkFun-Electromechanical; PROD_ID: SWCH-08441
SJ1-SJ16 TP1-TP80 = SparkFun-Passives
U1 U3 U5 U7 U9 U11 U13 U15 = sparkfun_photon_temp; PROD_ID: IC-12589
U2 U4 U6 U8 U10 U12 U14 U16 = SparkFun-PowerIC; PROD_ID: VREG-08170

## Nets
3.3V: C3.1 C4.1 C7.1 C8.1 C9.1 C10.1 C11.1 C12.1 JP5.3.3V JP6.1 LED3.AB LED3.AG LED3.AR R3.2 R6.2 R7.2 U1.2 U1.3 U1.5 U1.26 U1.27 U2.2 U2.4
3.3V1: C13.1 C15.1 C18.1 C19.1 C20.1 C22.1 C23.1 C24.1 JP7.3.3V JP8.1 LED4.AB LED4.AG LED4.AR R13.2 R18.2 R20.2 U3.2 U3.3 U3.5 U3.26 U3.27 U4.2 U4.4
3.3V2: C25.1 C27.1 C30.1 C31.1 C32.1 C34.1 C35.1 C36.1 JP12.3.3V JP13.1 LED7.AB LED7.AG LED7.AR R23.2 R28.2 R30.2 U5.2 U5.3 U5.5 U5.26 U5.27 U6.2 U6.4
3.3V3: C37.1 C39.1 C42.1 C43.1 C44.1 C46.1 C47.1 C48.1 JP17.3.3V JP18.1 LED10.AB LED10.AG LED10.AR R33.2 R38.2 R40.2 U7.2 U7.3 U7.5 U7.26 U7.27 U8.2 U8.4
3.3V4: C49.1 C51.1 C54.1 C55.1 C56.1 C58.1 C59.1 C60.1 JP22.3.3V JP23.1 LED13.AB LED13.AG LED13.AR R43.2 R48.2 R50.2 U9.2 U9.3 U9.5 U9.26 U9.27 U10.2 U10.4
3.3V5: C61.1 C63.1 C66.1 C67.1 C68.1 C70.1 C71.1 C72.1 JP27.3.3V JP28.1 LED16.AB LED16.AG LED16.AR R53.2 R58.2 R60.2 U11.2 U11.3 U11.5 U11.26 U11.27 U12.2 U12.4
3.3V6: C73.1 C75.1 C78.1 C79.1 C80.1 C82.1 C83.1 C84.1 JP32.3.3V JP33.1 LED19.AB LED19.AG LED19.AR R63.2 R68.2 R70.2 U13.2 U13.3 U13.5 U13.26 U13.27 U14.2 U14.4
3.3V7: C85.1 C87.1 C90.1 C91.1 C92.1 C94.1 C95.1 C96.1 JP37.3.3V JP38.1 LED22.AB LED22.AG LED22.AR R73.2 R78.2 R80.2 U15.2 U15.3 U15.5 U15.26 U15.27 U16.2 U16.4
!MODE: S2.3 U1.46
!MODE1: S4.3 U3.46
!MODE2: S6.3 U5.46
!MODE3: S8.3 U7.46
!MODE4: S10.3 U9.46
!MODE5: S12.3 U11.46
!MODE6: S14.3 U13.46
!MODE7: S16.3 U15.46
!RST: C2.1 JP5.RESET@1 JP6.15 R6.1 S1.3 U1.34
!RST1: C16.1 JP7.RESET@1 JP8.15 R13.1 S3.3 U3.34
!RST2: C28.1 JP12.RESET@1 JP13.15 R23.1 S5.3 U5.34
!RST3: C40.1 JP17.RESET@1 JP18.15 R33.1 S7.3 U7.34
!RST4: C52.1 JP22.RESET@1 JP23.15 R43.1 S9.3 U9.34
!RST5: C64.1 JP27.RESET@1 JP28.15 R53.1 S11.3 U11.34
!RST6: C76.1 JP32.RESET@1 JP33.15 R63.1 S13.3 U13.34
!RST7: C88.1 JP37.RESET@1 JP38.15 R73.1 S15.3 U15.34
A0: JP5.A0 U1.50
A1: JP5.A1 U1.43
A2: JP5.A2 JP5.D10 U1.49
A3: JP7.A2 JP7.D10 U3.49
A3/SPI_SCK: JP5.A3 JP5.D13 U1.22
A3/SPI_SCK1: JP7.A3 JP7.D13 U3.22
A3/SPI_SCK2: JP12.A3 JP12.D13 U5.22
A3/SPI_SCK3: JP17.A3 JP17.D13 U7.22
A3/SPI_SCK4: JP22.A3 JP22.D13 U9.22
A3/SPI_SCK5: JP27.A3 JP27.D13 U11.22
A3/SPI_SCK6: JP32.A3 JP32.D13 U13.22
A3/SPI_SCK7: JP37.A3 JP37.D13 U15.22
A4: JP7.A1 U3.43
A4/SPI_MISO: JP5.A4 JP5.D12 U1.21
A4/SPI_MISO1: JP7.A4 JP7.D12 U3.21
A4/SPI_MISO2: JP12.A4 JP12.D12 U5.21
A4/SPI_MISO3: JP17.A4 JP17.D12 U7.21
A4/SPI_MISO4: JP22.A4 JP22.D12 U9.21
A4/SPI_MISO5: JP27.A4 JP27.D12 U11.21
A4/SPI_MISO6: JP32.A4 JP32.D12 U13.21
A4/SPI_MISO7: JP37.A4 JP37.D12 U15.21
A5: JP7.A0 U3.50
A5/SPI_MOSI: JP5.A5 JP5.D11 U1.23
A5/SPI_MOSI1: JP7.A5 JP7.D11 U3.23
A5/SPI_MOSI2: JP12.A5 JP12.D11 U5.23
A5/SPI_MOSI3: JP17.A5 JP17.D11 U7.23
A5/SPI_MOSI4: JP22.A5 JP22.D11 U9.23
A5/SPI_MOSI5: JP27.A5 JP27.D11 U11.23
A5/SPI_MOSI6: JP32.A5 JP32.D11 U13.23
A5/SPI_MOSI7: JP37.A5 JP37.D11 U15.23
A6: JP12.A2 JP12.D10 U5.49
A7: JP12.A1 U5.43
A8: JP12.A0 U5.50
A9: JP17.A2 JP17.D10 U7.49
A10: JP17.A1 U7.43
A11: JP17.A0 U7.50
A12: JP22.A2 JP22.D10 U9.49
A13: JP22.A1 U9.43
A14: JP22.A0 U9.50
A15: JP27.A2 JP27.D10 U11.49
A16: JP27.A1 U11.43
A17: JP27.A0 U11.50
A18: JP32.A2 JP32.D10 U13.49
A19: JP32.A1 U13.43
A20: JP32.A0 U13.50
A21: JP37.A2 JP37.D10 U15.49
A22: JP37.A1 U15.43
A23: JP37.A0 U15.50
BTCX_RF_ACTIVE: TP3.P$1 U1.57
BTCX_RF_ACTIVE1: TP11.P$1 U3.57
BTCX_RF_ACTIVE2: TP21.P$1 U5.57
BTCX_RF_ACTIVE3: TP31.P$1 U7.57
BTCX_RF_ACTIVE4: TP41.P$1 U9.57
BTCX_RF_ACTIVE5: TP51.P$1 U11.57
BTCX_RF_ACTIVE6: TP61.P$1 U13.57
BTCX_RF_ACTIVE7: TP71.P$1 U15.57
BTCX_STATUS: TP2.P$1 U1.56
BTCX_STATUS1: TP13.P$1 U3.56
BTCX_STATUS2: TP23.P$1 U5.56
BTCX_STATUS3: TP33.P$1 U7.56
BTCX_STATUS4: TP43.P$1 U9.56
BTCX_STATUS5: TP53.P$1 U11.56
BTCX_STATUS6: TP63.P$1 U13.56
BTCX_STATUS7: TP73.P$1 U15.56
BTCX_TXCONF: TP1.P$1 U1.58
BTCX_TXCONF1: TP12.P$1 U3.58
BTCX_TXCONF2: TP22.P$1 U5.58
BTCX_TXCONF3: TP32.P$1 U7.58
BTCX_TXCONF4: TP42.P$1 U9.58
BTCX_TXCONF5: TP52.P$1 U11.58
BTCX_TXCONF6: TP62.P$1 U13.58
BTCX_TXCONF7: TP72.P$1 U15.58
D0/SDA: JP5.SDA U1.36
D0/SDA1: JP7.SDA U3.36
D0/SDA2: JP12.SDA U5.36
D0/SDA3: JP17.SDA U7.36
D0/SDA4: JP22.SDA U9.36
D0/SDA5: JP27.SDA U11.36
D0/SDA6: JP32.SDA U13.36
D0/SDA7: JP37.SDA U15.36
D1: JP7.D2 U3.45
D1/SCL: JP5.SCL U1.35
D1/SCL1: JP7.SCL U3.35
D1/SCL2: JP12.SCL U5.35
D1/SCL3: JP17.SCL U7.35
D1/SCL4: JP22.SCL U9.35
D1/SCL5: JP27.SCL U11.35
D1/SCL6: JP32.SCL U13.35
D1/SCL7: JP37.SCL U15.35
D2: JP5.D2 U1.45
D3: JP12.D2 U5.45
D3(JTAG_TRST): JP5.D3 JP6.3 U1.51
D3(JTAG_TRST)1: JP7.D3 JP8.3 U3.51
D3(JTAG_TRST)2: JP12.D3 JP13.3 U5.51
D3(JTAG_TRST)3: JP17.D3 JP18.3 U7.51
D3(JTAG_TRST)4: JP22.D3 JP23.3 U9.51
D3(JTAG_TRST)5: JP27.D3 JP28.3 U11.51
D3(JTAG_TRST)6: JP32.D3 JP33.3 U13.51
D3(JTAG_TRST)7: JP37.D3 JP38.3 U15.51
D4: JP17.D2 U7.45
D4(JTAG_TDO): JP5.D4 JP6.13 U1.52
D4(JTAG_TDO)1: JP7.D4 JP8.13 U3.52
D4(JTAG_TDO)2: JP12.D4 JP13.13 U5.52
D4(JTAG_TDO)3: JP17.D4 JP18.13 U7.52
D4(JTAG_TDO)4: JP22.D4 JP23.13 U9.52
D4(JTAG_TDO)5: JP27.D4 JP28.13 U11.52
D4(JTAG_TDO)6: JP32.D4 JP33.13 U13.52
D4(JTAG_TDO)7: JP37.D4 JP38.13 U15.52
D5: JP22.D2 U9.45
D5(JTAG_TDI): JP5.D5 JP6.5 U1.53
D5(JTAG_TDI)1: JP7.D5 JP8.5 U3.53
D5(JTAG_TDI)2: JP12.D5 JP13.5 U5.53
D5(JTAG_TDI)3: JP17.D5 JP18.5 U7.53
D5(JTAG_TDI)4: JP22.D5 JP23.5 U9.53
D5(JTAG_TDI)5: JP27.D5 JP28.5 U11.53
D5(JTAG_TDI)6: JP32.D5 JP33.5 U13.53
D5(JTAG_TDI)7: JP37.D5 JP38.5 U15.53
D6: JP27.D2 U11.45
D6(JTAG_TCK): JP5.D6 JP6.9 U1.55
D6(JTAG_TCK)1: JP7.D6 JP8.9 U3.55
D6(JTAG_TCK)2: JP12.D6 JP13.9 U5.55
D6(JTAG_TCK)3: JP17.D6 JP18.9 U7.55
D6(JTAG_TCK)4: JP22.D6 JP23.9 U9.55
D6(JTAG_TCK)5: JP27.D6 JP28.9 U11.55
D6(JTAG_TCK)6: JP32.D6 JP33.9 U13.55
D6(JTAG_TCK)7: JP37.D6 JP38.9 U15.55
D7: JP32.D2 U13.45
D7(JTAG_TMS): JP5.D7 JP6.7 R5.1 U1.54
D7(JTAG_TMS)1: JP7.D7 JP8.7 R17.1 U3.54
D7(JTAG_TMS)2: JP12.D7 JP13.7 R27.1 U5.54
D7(JTAG_TMS)3: JP17.D7 JP18.7 R37.1 U7.54
D7(JTAG_TMS)4: JP22.D7 JP23.7 R47.1 U9.54
D7(JTAG_TMS)5: JP27.D7 JP28.7 R57.1 U11.54
D7(JTAG_TMS)6: JP32.D7 JP33.7 R67.1 U13.54
D7(JTAG_TMS)7: JP37.D7 JP38.7 R77.1 U15.54
D8: JP37.D2 U15.45
D+: J1.D+ R2.1
D+1: J2.D+ R12.1
D+2: J3.D+ R22.1
D+3: J4.D+ R32.1
D+4: J5.D+ R42.1
D+5: J6.D+ R52.1
D+6: J7.D+ R62.1
D+7: J8.D+ R72.1
D-: J1.D- R1.1
D-1: J2.D- R11.1
D-2: J3.D- R21.1
D-3: J4.D- R31.1
D-4: J5.D- R41.1
D-5: J6.D- R51.1
D-6: J7.D- R61.1
D-7: J8.D- R71.1
DAC: JP5.D8 U1.24
DAC1: JP7.D8 U3.24
DAC2: JP12.D8 U5.24
DAC3: JP17.D8 U7.24
DAC4: JP22.D8 U9.24
DAC5: JP27.D8 U11.24
DAC6: JP32.D8 U13.24
DAC7: JP37.D8 U15.24
GND: C1.C C2.2 C3.2 C4.2 C5.2 C6.2 C7.2 C8.2 C9.2 C10.2 C11.2 C12.2 J1.GND J1.P$1 J1.P$2 J1.P$3 J1.P$4 J1.P$6 J1.P$8 J1.P$10 J1.P$12 J1.SHEILD2 J1.SHIELD J1.SHIELD3 J1.SHIELD4 JP2.GND JP2.GNDBREAK JP4.1 JP5.GND@1 JP5.GND@2 JP5.GND@3 JP6.4 JP6.6 JP6.8 JP6.10 JP6.11 JP6.12 JP6.14 JP6.16 JP6.18 JP6.20 R4.1 S1.1 S2.1 SJ1.1 SJ2.1 U1.1 U1.4 U1.6 U1.13 U1.15 U1.25 U1.28 U1.37 U1.39 U1.59 U1.65 U1.66 U1.67 U1.68 U1.69 U1.70 U1.71 U1.72 U1.73
GND1: C13.2 C14.C C15.2 C16.2 C17.2 C18.2 C19.2 C20.2 C21.2 C22.2 C23.2 C24.2 J2.GND J2.P$1 J2.P$2 J2.P$3 J2.P$4 J2.P$6 J2.P$8 J2.P$10 J2.P$12 J2.SHEILD2 J2.SHIELD J2.SHIELD3 J2.SHIELD4 JP1.GND JP1.GNDBREAK JP7.GND@1 JP7.GND@2 JP7.GND@3 JP8.4 JP8.6 JP8.8 JP8.10 JP8.11 JP8.12 JP8.14 JP8.16 JP8.18 JP8.20 JP10.1 R19.1 S3.1 S4.1 SJ3.1 SJ4.1 U3.1 U3.4 U3.6 U3.13 U3.15 U3.25 U3.28 U3.37 U3.39 U3.59 U3.65 U3.66 U3.67 U3.68 U3.69 U3.70 U3.71 U3.72 U3.73
GND2: C25.2 C26.C C27.2 C28.2 C29.2 C30.2 C31.2 C32.2 C33.2 C34.2 C35.2 C36.2 J3.GND J3.P$1 J3.P$2 J3.P$3 J3.P$4 J3.P$6 J3.P$8 J3.P$10 J3.P$12 J3.SHEILD2 J3.SHIELD J3.SHIELD3 J3.SHIELD4 JP11.GND JP11.GNDBREAK JP12.GND@1 JP12.GND@2 JP12.GND@3 JP13.4 JP13.6 JP13.8 JP13.10 JP13.11 JP13.12 JP13.14 JP13.16 JP13.18 JP13.20 JP15.1 R29.1 S5.1 S6.1 SJ5.1 SJ6.1 U5.1 U5.4 U5.6 U5.13 U5.15 U5.25 U5.28 U5.37 U5.39 U5.59 U5.65 U5.66 U5.67 U5.68 U5.69 U5.70 U5.71 U5.72 U5.73
GND3: C37.2 C38.C C39.2 C40.2 C41.2 C42.2 C43.2 C44.2 C45.2 C46.2 C47.2 C48.2 J4.GND J4.P$1 J4.P$2 J4.P$3 J4.P$4 J4.P$6 J4.P$8 J4.P$10 J4.P$12 J4.SHEILD2 J4.SHIELD J4.SHIELD3 J4.SHIELD4 JP16.GND JP16.GNDBREAK JP17.GND@1 JP17.GND@2 JP17.GND@3 JP18.4 JP18.6 JP18.8 JP18.10 JP18.11 JP18.12 JP18.14 JP18.16 JP18.18 JP18.20 JP20.1 R39.1 S7.1 S8.1 SJ7.1 SJ8.1 U7.1 U7.4 U7.6 U7.13 U7.15 U7.25 U7.28 U7.37 U7.39 U7.59 U7.65 U7.66 U7.67 U7.68 U7.69 U7.70 U7.71 U7.72 U7.73
GND4: C49.2 C50.C C51.2 C52.2 C53.2 C54.2 C55.2 C56.2 C57.2 C58.2 C59.2 C60.2 J5.GND J5.P$1 J5.P$2 J5.P$3 J5.P$4 J5.P$6 J5.P$8 J5.P$10 J5.P$12 J5.SHEILD2 J5.SHIELD J5.SHIELD3 J5.SHIELD4 JP21.GND JP21.GNDBREAK JP22.GND@1 JP22.GND@2 JP22.GND@3 JP23.4 JP23.6 JP23.8 JP23.10 JP23.11 JP23.12 JP23.14 JP23.16 JP23.18 JP23.20 JP25.1 R49.1 S9.1 S10.1 SJ9.1 SJ10.1 U9.1 U9.4 U9.6 U9.13 U9.15 U9.25 U9.28 U9.37 U9.39 U9.59 U9.65 U9.66 U9.67 U9.68 U9.69 U9.70 U9.71 U9.72 U9.73
GND5: C61.2 C62.C C63.2 C64.2 C65.2 C66.2 C67.2 C68.2 C69.2 C70.2 C71.2 C72.2 J6.GND J6.P$1 J6.P$2 J6.P$3 J6.P$4 J6.P$6 J6.P$8 J6.P$10 J6.P$12 J6.SHEILD2 J6.SHIELD J6.SHIELD3 J6.SHIELD4 JP26.GND JP26.GNDBREAK JP27.GND@1 JP27.GND@2 JP27.GND@3 JP28.4 JP28.6 JP28.8 JP28.10 JP28.11 JP28.12 JP28.14 JP28.16 JP28.18 JP28.20 JP30.1 R59.1 S11.1 S12.1 SJ11.1 SJ12.1 U11.1 U11.4 U11.6 U11.13 U11.15 U11.25 U11.28 U11.37 U11.39 U11.59 U11.65 U11.66 U11.67 U11.68 U11.69 U11.70 U11.71 U11.72 U11.73
GND6: C73.2 C74.C C75.2 C76.2 C77.2 C78.2 C79.2 C80.2 C81.2 C82.2 C83.2 C84.2 J7.GND J7.P$1 J7.P$2 J7.P$3 J7.P$4 J7.P$6 J7.P$8 J7.P$10 J7.P$12 J7.SHEILD2 J7.SHIELD J7.SHIELD3 J7.SHIELD4 JP31.GND JP31.GNDBREAK JP32.GND@1 JP32.GND@2 JP32.GND@3 JP33.4 JP33.6 JP33.8 JP33.10 JP33.11 JP33.12 JP33.14 JP33.16 JP33.18 JP33.20 JP35.1 R69.1 S13.1 S14.1 SJ13.1 SJ14.1 U13.1 U13.4 U13.6 U13.13 U13.15 U13.25 U13.28 U13.37 U13.39 U13.59 U13.65 U13.66 U13.67 U13.68 U13.69 U13.70 U13.71 U13.72 U13.73
GND7: C85.2 C86.C C87.2 C88.2 C89.2 C90.2 C91.2 C92.2 C93.2 C94.2 C95.2 C96.2 J8.GND J8.P$1 J8.P$2 J8.P$3 J8.P$4 J8.P$6 J8.P$8 J8.P$10 J8.P$12 J8.SHEILD2 J8.SHIELD J8.SHIELD3 J8.SHIELD4 JP36.GND JP36.GNDBREAK JP37.GND@1 JP37.GND@2 JP37.GND@3 JP38.4 JP38.6 JP38.8 JP38.10 JP38.11 JP38.12 JP38.14 JP38.16 JP38.18 JP38.20 JP40.1 R79.1 S15.1 S16.1 SJ15.1 SJ16.1 U15.1 U15.4 U15.6 U15.13 U15.15 U15.25 U15.28 U15.37 U15.39 U15.59 U15.65 U15.66 U15.67 U15.68 U15.69 U15.70 U15.71 U15.72 U15.73
MCU_USB_D+: R2.2 U1.61
MCU_USB_D+1: R12.2 U3.61
MCU_USB_D+2: R22.2 U5.61
MCU_USB_D+3: R32.2 U7.61
MCU_USB_D+4: R42.2 U9.61
MCU_USB_D+5: R52.2 U11.61
MCU_USB_D+6: R62.2 U13.61
MCU_USB_D+7: R72.2 U15.61
MCU_USB_D-: R1.2 U1.62
MCU_USB_D-1: R11.2 U3.62
MCU_USB_D-2: R21.2 U5.62
MCU_USB_D-3: R31.2 U7.62
MCU_USB_D-4: R41.2 U9.62
MCU_USB_D-5: R51.2 U11.62
MCU_USB_D-6: R61.2 U13.62
MCU_USB_D-7: R71.2 U15.62
N$1: TP10.P$1 U1.33
N$2: LED1.C SJ1.2
N$3: LED3.CG R8.1
N$4: LED3.CR R9.1
N$5: LED3.CB R10.1
N$6: LED1.A R3.1
N$7: LED2.A R5.2
N$8: LED2.C SJ2.2
N$9: R19.2 R20.1 U4.1
N$10: LED4.CG R16.1
N$11: LED4.CR R15.1
N$12: LED4.CB R14.1
N$13: LED5.A R17.2
N$14: LED6.A R18.1
N$15: R4.2 R7.1 U2.1
N$16: TP20.P$1 U3.33
N$17: LED6.C SJ3.2
N$18: LED5.C SJ4.2
N$19: R29.2 R30.1 U6.1
N$20: LED7.CG R26.1
N$21: LED7.CR R25.1
N$22: LED7.CB R24.1
N$23: LED8.A R27.2
N$24: LED9.A R28.1
N$25: TP30.P$1 U5.33
N$26: LED9.C SJ5.2
N$27: LED8.C SJ6.2
N$28: R39.2 R40.1 U8.1
N$29: LED10.CG R36.1
N$30: LED10.CR R35.1
N$31: LED10.CB R34.1
N$32: LED11.A R37.2
N$33: LED12.A R38.1
N$34: TP40.P$1 U7.33
N$35: LED12.C SJ7.2
N$36: LED11.C SJ8.2
N$37: R49.2 R50.1 U10.1
N$38: LED13.CG R46.1
N$39: LED13.CR R45.1
N$40: LED13.CB R44.1
N$41: LED14.A R47.2
N$42: LED15.A R48.1
N$43: TP50.P$1 U9.33
N$44: LED15.C SJ9.2
N$45: LED14.C SJ10.2
N$46: R59.2 R60.1 U12.1
N$47: LED16.CG R56.1
N$48: LED16.CR R55.1
N$49: LED16.CB R54.1
N$50: LED17.A R57.2
N$51: LED18.A R58.1
N$52: TP60.P$1 U11.33
N$53: LED18.C SJ11.2
N$54: LED17.C SJ12.2
N$55: R69.2 R70.1 U14.1
N$56: LED19.CG R66.1
N$57: LED19.CR R65.1
N$58: LED19.CB R64.1
N$59: LED20.A R67.2
N$60: LED21.A R68.1
N$61: TP70.P$1 U13.33
N$62: LED21.C SJ13.2
N$63: LED20.C SJ14.2
N$64: R79.2 R80.1 U16.1
N$65: LED22.CG R76.1
N$66: LED22.CR R75.1
N$67: LED22.CB R74.1
N$68: LED23.A R77.2
N$69: LED24.A R78.1
N$70: TP80.P$1 U15.33
N$71: LED24.C SJ15.2
N$72: LED23.C SJ16.2
RGB_BLUE: R10.2 U1.31
RGB_BLUE1: R14.2 U3.31
RGB_BLUE2: R24.2 U5.31
RGB_BLUE3: R34.2 U7.31
RGB_BLUE4: R44.2 U9.31
RGB_BLUE5: R54.2 U11.31
RGB_BLUE6: R64.2 U13.31
RGB_BLUE7: R74.2 U15.31
RGB_GREEN: R8.2 U1.32
RGB_GREEN1: R16.2 U3.32
RGB_GREEN2: R26.2 U5.32
RGB_GREEN3: R36.2 U7.32
RGB_GREEN4: R46.2 U9.32
RGB_GREEN5: R56.2 U11.32
RGB_GREEN6: R66.2 U13.32
RGB_GREEN7: R76.2 U15.32
RGB_RED: R9.2 U1.29
RGB_RED1: R15.2 U3.29
RGB_RED2: R25.2 U5.29
RGB_RED3: R35.2 U7.29
RGB_RED4: R45.2 U9.29
RGB_RED5: R55.2 U11.29
RGB_RED6: R65.2 U13.29
RGB_RED7: R75.2 U15.29
RX: JP5.D0 U1.63
RX1: JP7.D0 U3.63
RX2: JP12.D0 U5.63
RX3: JP17.D0 U7.63
RX4: JP22.D0 U9.63
RX5: JP27.D0 U11.63
RX6: JP32.D0 U13.63
RX7: JP37.D0 U15.63
SPARE1: JP3.6 U1.40
SPARE2: JP3.5 U1.41
SPARE3: JP3.4 U1.42
SPARE4: JP3.3 U1.44
SPARE5: JP3.2 U1.47
SPARE6: JP3.1 U1.48
SPARE7: JP9.6 U3.40
SPARE8: JP9.5 U3.41
SPARE9: JP9.4 U3.42
SPARE10: JP9.3 U3.44
SPARE11: JP9.2 U3.47
SPARE12: JP9.1 U3.48
SPARE13: JP14.6 U5.40
SPARE14: JP14.5 U5.41
SPARE15: JP14.4 U5.42
SPARE16: JP14.3 U5.44
SPARE17: JP14.2 U5.47
SPARE18: JP14.1 U5.48
SPARE19: JP19.6 U7.40
SPARE20: JP19.5 U7.41
SPARE21: JP19.4 U7.42
SPARE22: JP19.3 U7.44
SPARE23: JP19.2 U7.47
SPARE24: JP19.1 U7.48
SPARE25: JP24.6 U9.40
SPARE26: JP24.5 U9.41
SPARE27: JP24.4 U9.42
SPARE28: JP24.3 U9.44
SPARE29: JP24.2 U9.47
SPARE30: JP24.1 U9.48
SPARE31: JP29.6 U11.40
SPARE32: JP29.5 U11.41
SPARE33: JP29.4 U11.42
SPARE34: JP29.3 U11.44
SPARE35: JP29.2 U11.47
SPARE36: JP29.1 U11.48
SPARE37: JP34.6 U13.40
SPARE38: JP34.5 U13.41
SPARE39: JP34.4 U13.42
SPARE40: JP34.3 U13.44
SPARE41: JP34.2 U13.47
SPARE42: JP34.1 U13.48
SPARE43: JP39.6 U15.40
SPARE44: JP39.5 U15.41
SPARE45: JP39.4 U15.42
SPARE46: JP39.3 U15.44
SPARE47: JP39.2 U15.47
SPARE48: JP39.1 U15.48
TX: JP5.D1 U1.64
TX1: JP7.D1 U3.64
TX2: JP12.D1 U5.64
TX3: JP17.D1 U7.64
TX4: JP22.D1 U9.64
TX5: JP27.D1 U11.64
TX6: JP32.D1 U13.64
TX7: JP37.D1 U15.64
VBAT: C5.1 C6.1 JP4.2 U1.38
VBAT1: C17.1 C21.1 JP10.2 U3.38
VBAT2: C29.1 C33.1 JP15.2 U5.38
VBAT3: C41.1 C45.1 JP20.2 U7.38
VBAT4: C53.1 C57.1 JP25.2 U9.38
VBAT5: C65.1 C69.1 JP30.2 U11.38
VBAT6: C77.1 C81.1 JP35.2 U13.38
VBAT7: C89.1 C93.1 JP40.2 U15.38
VIN: C1.A D1.C JP2.PWR JP5.VIN U2.3
VIN1: C14.A D2.C JP1.PWR JP7.VIN U4.3
VIN2: C26.A D3.C JP11.PWR JP12.VIN U6.3
VIN3: C38.A D4.C JP16.PWR JP17.VIN U8.3
VIN4: C50.A D5.C JP21.PWR JP22.VIN U10.3
VIN5: C62.A D6.C JP26.PWR JP27.VIN U12.3
VIN6: C74.A D7.C JP31.PWR JP32.VIN U14.3
VIN7: C86.A D8.C JP36.PWR JP37.VIN U16.3
VUSB: D1.A J1.VBUS JP5.5V
VUSB1: D2.A J2.VBUS JP7.5V
VUSB2: D3.A J3.VBUS JP12.5V
VUSB3: D4.A J4.VBUS JP17.5V
VUSB4: D5.A J5.VBUS JP22.5V
VUSB5: D6.A J6.VBUS JP27.5V
VUSB6: D7.A J7.VBUS JP32.5V
VUSB7: D8.A J8.VBUS JP37.5V
WKP: JP5.D9 U1.30
WKP1: JP7.D9 U3.30
WKP2: JP12.D9 U5.30
WKP3: JP17.D9 U7.30
WKP4: JP22.D9 U9.30
WKP5: JP27.D9 U11.30
WKP6: JP32.D9 U13.30
WKP7: JP37.D9 U15.30
WL_JTAG_TCK: TP5.P$1 U1.17
WL_JTAG_TCK1: TP15.P$1 U3.17
WL_JTAG_TCK2: TP25.P$1 U5.17
WL_JTAG_TCK3: TP35.P$1 U7.17
WL_JTAG_TCK4: TP45.P$1 U9.17
WL_JTAG_TCK5: TP55.P$1 U11.17
WL_JTAG_TCK6: TP65.P$1 U13.17
WL_JTAG_TCK7: TP75.P$1 U15.17
WL_JTAG_TDI: TP4.P$1 U1.16
WL_JTAG_TDI1: TP14.P$1 U3.16
WL_JTAG_TDI2: TP24.P$1 U5.16
WL_JTAG_TDI3: TP34.P$1 U7.16
WL_JTAG_TDI4: TP44.P$1 U9.16
WL_JTAG_TDI5: TP54.P$1 U11.16
WL_JTAG_TDI6: TP64.P$1 U13.16
WL_JTAG_TDI7: TP74.P$1 U15.16
WL_JTAG_TDO: TP8.P$1 U1.20
WL_JTAG_TDO1: TP18.P$1 U3.20
WL_JTAG_TDO2: TP28.P$1 U5.20
WL_JTAG_TDO3: TP38.P$1 U7.20
WL_JTAG_TDO4: TP48.P$1 U9.20
WL_JTAG_TDO5: TP58.P$1 U11.20
WL_JTAG_TDO6: TP68.P$1 U13.20
WL_JTAG_TDO7: TP78.P$1 U15.20
WL_JTAG_TMS: TP7.P$1 U1.19
WL_JTAG_TMS1: TP17.P$1 U3.19
WL_JTAG_TMS2: TP27.P$1 U5.19
WL_JTAG_TMS3: TP37.P$1 U7.19
WL_JTAG_TMS4: TP47.P$1 U9.19
WL_JTAG_TMS5: TP57.P$1 U11.19
WL_JTAG_TMS6: TP67.P$1 U13.19
WL_JTAG_TMS7: TP77.P$1 U15.19
WL_JTAG_TRST: TP6.P$1 U1.18
WL_JTAG_TRST1: TP16.P$1 U3.18
WL_JTAG_TRST2: TP26.P$1 U5.18
WL_JTAG_TRST3: TP36.P$1 U7.18
WL_JTAG_TRST4: TP46.P$1 U9.18
WL_JTAG_TRST5: TP56.P$1 U11.18
WL_JTAG_TRST6: TP66.P$1 U13.18
WL_JTAG_TRST7: TP76.P$1 U15.18
WL_SLEEP_CLK: TP9.P$1 U1.60
WL_SLEEP_CLK1: TP19.P$1 U3.60
WL_SLEEP_CLK2: TP29.P$1 U5.60
WL_SLEEP_CLK3: TP39.P$1 U7.60
WL_SLEEP_CLK4: TP49.P$1 U9.60
WL_SLEEP_CLK5: TP59.P$1 U11.60
WL_SLEEP_CLK6: TP69.P$1 U13.60
WL_SLEEP_CLK7: TP79.P$1 U15.60

## Tracks (layer width: path | path; a pad name or v marks a point on that pad's centre or on a via)
3.3V  (via drill 0.51)
  Top 0.305: 31.75,82.97 31.75,81.53 32.38,80.9 R3.2 | 31.75,82.97 31.75,84.07 | LED3.AG 31.79,85.17 31.75,85.22 | LED3.AB 31.75,82.97 | LED3.AR 31.75,84.07 | C3.1 25.03,109.94 26.25,111.16 R6.2 | 31.75,84.07 31.75,85.22 | 31.75,85.22 31.75,85.85 v30.99,86.61
  Top 0.508: 24.98,86.61 v26.16,86.61 | 53.34,103.12 JP6.1 | 24.98,86.61 C4.1 25.03,87.88 C3.1 | R7.2 24.98,86.61 | U1.5 62.74,99.57 62.45,99.86 C7.1 C8.1 62.45,103.12 | v49.02,101.85 50.29,103.12 53.34,103.12 | 53.34,103.12 62.45,103.12 | 62.45,103.12 64.77,103.12 65.19,102.7 C12.1 C11.1 64.74,100.13 64.74,99.69 | U1.3 64.74,99.69 | U1.2 65.74,99.61 65.66,99.69 64.74,99.69 | v45.72,86.61 45.94,86.4 C9.1 C10.1 49.77,86.15 50.42,86.15 | 50.42,86.15 U1.27 | U1.26 50.7,87.15 50.55,87 50.55,86.28 50.42,86.15 | U2.2 24.98,86.61
  Bottom 0.508: JP5.3.3V 46.99,85.34 v45.72,86.61 v30.99,86.61 v26.16,86.61 26.16,96.27 31.75,101.85 v49.02,101.85
  other vias: 12.7,91.06 12.7,88.52 12.7,85.98 12.7,83.44 12.7,80.9 14.61,89.79 14.61,83.44 19.05,87.63 19.05,85.34 20.95,91.06 20.95,80.9
  pour Top (isolate 0.305): 11.43,91.69 21.59,91.69 21.59,80.26 11.43,80.26
  pour Bottom (isolate 0.305): 11.43,91.69 21.59,91.69 21.59,80.26 11.43,80.26
3.3V1  (via drill 0.51)
  Top 0.305: 105.41,82.97 105.41,81.53 106.05,80.9 R18.2 | 105.41,82.97 105.41,84.07 | LED4.AG 105.45,85.17 105.41,85.22 | LED4.AB 105.41,82.97 | LED4.AR 105.41,84.07 | C15.1 98.69,109.94 99.91,111.16 R13.2 | 105.41,84.07 105.41,85.22 | 105.41,85.22 105.41,85.85 v104.65,86.61
  Top 0.508: 98.64,86.61 v99.82,86.61 | 127,103.12 JP8.1 | 98.64,86.61 C13.1 98.69,87.88 C15.1 | R20.2 98.64,86.61 | U3.5 136.4,99.57 136.1,99.86 C18.1 C22.1 136.1,103.12 | v122.68,101.85 123.95,103.12 127,103.12 | 127,103.12 136.1,103.12 | 136.1,103.12 138.43,103.12 138.85,102.7 C24.1 C20.1 138.4,100.13 138.4,99.69 | U3.3 138.4,99.69 | U3.2 139.4,99.61 139.32,99.69 138.4,99.69 | v119.38,86.61 119.59,86.4 C23.1 C19.1 123.44,86.15 124.08,86.15 | 124.08,86.15 U3.27 | U3.26 124.36,87.15 124.21,87 124.21,86.28 124.08,86.15 | U4.2 98.64,86.61
  Bottom 0.508: JP7.3.3V 120.65,85.34 v119.38,86.61 v104.65,86.61 v99.82,86.61 99.82,96.27 105.41,101.85 v122.68,101.85
  other vias: 86.36,91.06 86.36,88.52 86.36,85.98 86.36,83.44 86.36,80.9 88.27,89.79 88.27,83.44 92.71,87.63 92.71,85.34 94.61,91.06 94.61,80.9
  pour Top (isolate 0.305): 85.09,91.69 95.25,91.69 95.25,80.26 85.09,80.26
  pour Bottom (isolate 0.305): 85.09,91.69 95.25,91.69 95.25,80.26 85.09,80.26
3.3V2  (via drill 0.51)
  Top 0.305: 179.07,82.97 179.07,81.53 179.71,80.9 R28.2 | 179.07,82.97 179.07,84.07 | LED7.AG 179.11,85.17 179.07,85.22 | LED7.AB 179.07,82.97 | LED7.AR 179.07,84.07 | C27.1 172.35,109.94 173.57,111.16 R23.2 | 179.07,84.07 179.07,85.22 | 179.07,85.22 179.07,85.85 v178.31,86.61
  Top 0.508: 172.3,86.61 v173.48,86.61 | 200.66,103.12 JP13.1 | 172.3,86.61 C25.1 172.35,87.88 C27.1 | R30.2 172.3,86.61 | U5.5 210.06,99.57 209.76,99.86 C30.1 C34.1 209.76,103.12 | v196.34,101.85 197.61,103.12 200.66,103.12 | 200.66,103.12 209.76,103.12 | 209.76,103.12 212.09,103.12 212.51,102.7 C36.1 C32.1 212.06,100.13 212.06,99.69 | U5.3 212.06,99.69 | U5.2 213.06,99.61 212.98,99.69 212.06,99.69 | v193.04,86.61 193.25,86.4 C35.1 C31.1 197.09,86.15 197.74,86.15 | 197.74,86.15 U5.27 | U5.26 198.03,87.15 197.87,87 197.87,86.28 197.74,86.15 | U6.2 172.3,86.61
  Bottom 0.508: JP12.3.3V 194.31,85.34 v193.04,86.61 v178.31,86.61 v173.48,86.61 173.48,96.27 179.07,101.85 v196.34,101.85
  other vias: 160.02,91.06 160.02,88.52 160.02,85.98 160.02,83.44 160.02,80.9 161.93,89.79 161.93,83.44 166.37,87.63 166.37,85.34 168.28,91.06 168.28,80.9
  pour Top (isolate 0.305): 158.75,91.69 168.91,91.69 168.91,80.26 158.75,80.26
  pour Bottom (isolate 0.305): 158.75,91.69 168.91,91.69 168.91,80.26 158.75,80.26
3.3V3  (via drill 0.51)
  Top 0.305: 252.73,82.97 252.73,81.53 253.37,80.9 R38.2 | 252.73,82.97 252.73,84.07 | LED10.AG 252.77,85.17 252.73,85.22 | LED10.AB 252.73,82.97 | LED10.AR 252.73,84.07 | C39.1 246.01,109.94 247.23,111.16 R33.2 | 252.73,84.07 252.73,85.22 | 252.73,85.22 252.73,85.85 v251.97,86.61
  Top 0.508: 245.96,86.61 v247.14,86.61 | 274.32,103.12 JP18.1 | 245.96,86.61 C37.1 246.01,87.88 C39.1 | R40.2 245.96,86.61 | U7.5 283.72,99.57 283.43,99.86 C42.1 C46.1 283.43,103.12 | v270,101.85 271.27,103.12 274.32,103.12 | 274.32,103.12 283.43,103.12 | 283.43,103.12 285.75,103.12 286.17,102.7 C48.1 C44.1 285.72,100.13 285.72,99.69 | U7.3 285.72,99.69 | U7.2 286.72,99.61 286.64,99.69 285.72,99.69 | v266.7,86.61 266.92,86.4 C47.1 C43.1 270.75,86.15 271.4,86.15 | 271.4,86.15 U7.27 | U7.26 271.69,87.15 271.53,87 271.53,86.28 271.4,86.15 | U8.2 245.96,86.61
  Bottom 0.508: JP17.3.3V 267.97,85.34 v266.7,86.61 v251.97,86.61 v247.14,86.61 247.14,96.27 252.73,101.85 v270,101.85
  other vias: 233.68,91.06 233.68,88.52 233.68,85.98 233.68,83.44 233.68,80.9 235.59,89.79 235.59,83.44 240.03,87.63 240.03,85.34 241.94,91.06 241.94,80.9
  pour Top (isolate 0.305): 232.41,91.69 242.57,91.69 242.57,80.26 232.41,80.26
  pour Bottom (isolate 0.305): 232.41,91.69 242.57,91.69 242.57,80.26 232.41,80.26
3.3V4  (via drill 0.51)